# Altium PCB DClassAmp.PcbDoc (part 3 of 3)
Units mm, origin at the board's own origin, x right, y up, seen from the top; angles counter-clockwise.
Board outline 100 x 100 mm, 4 copper layers (Top Layer, Layer 1, Layer 2, Bottom Layer), stack 1.57 mm thick; 192 components, 70 nets, 450 pads, 316 vias.
Unrouted connection lines stored in the file: 103.
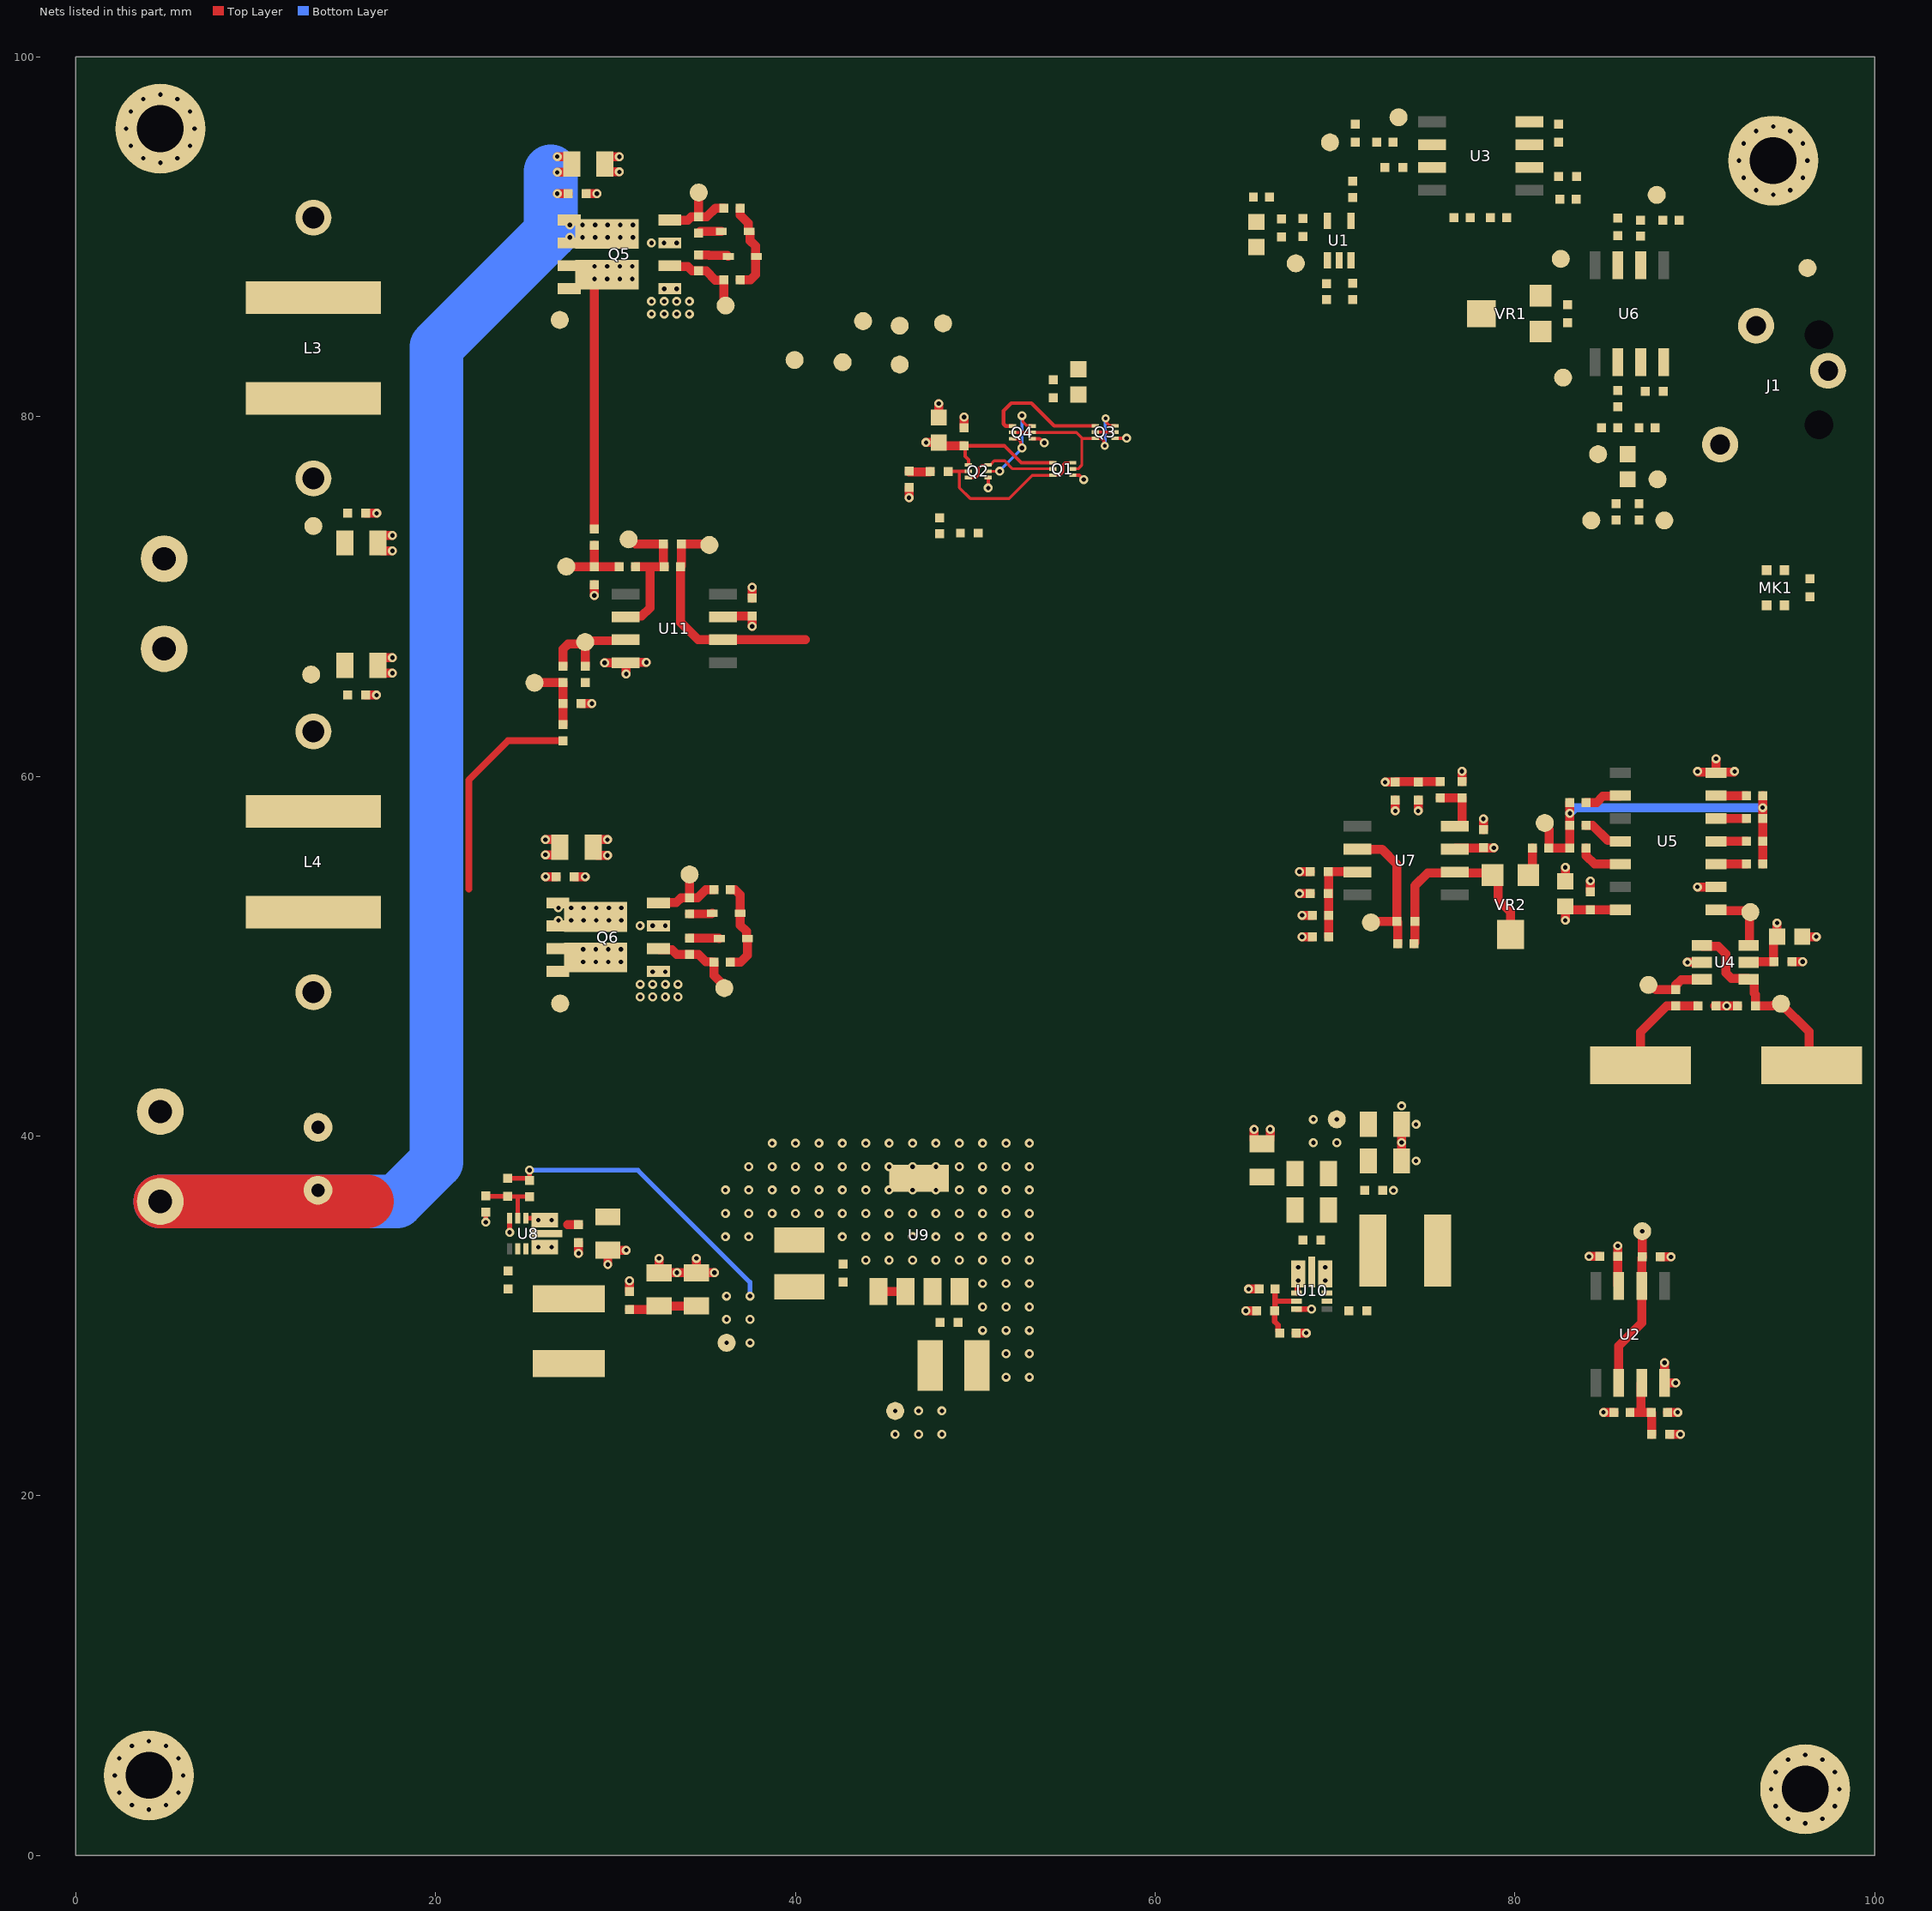
[diagram p4: the nets of this part, all layers, seen from the top]

## Part data (continued)
R34 R35 R36 R37 R39 R40 R41 R42: library part "RES 10R0 1% 63mW 0402", "Res Thick Film 0402 10 Ohm 1% 0.063W(1/16W) ±100ppm/C Pad SMD T/R", Case Code (Imperial)=0402, Case Code (Metric)=1005, Manufacturer=Samsung, Manufacturer Part Number=RC1005F100CS, Max Operating Temperature=155°C, Max Power Dissipation=63mW, Min Operating Temperature=-55°C, Package Quantity=1, Resistance=10R, Resistor Type="Thick Film", Supplier Part Number 1=1276-3428-1-ND, Temperature Coefficient=100ppm/°C, Tolerance=1%, Voltage Rating (DC)=50V, Case/Package=0402, Category="Chip SMD Resistors", ComponentLink1Description=http://components.arrow.com/part/dataview/51848233S9968285N4139?src-supplier=Arrow+Electronics, ComponentLink1URL=http://components.arrow.com/part/dataview/51848233S9968285N4139?src-supplier=Arrow+Electronics, ComponentLink2Description=http://components.arrow.com/part/dataview/0323_06900041?src-supplier=Arrow+Europe, ComponentLink2URL=http://components.arrow.com/part/dataview/0323_06900041?src-supplier=Arrow+Europe, ComponentLink3Description=http://www.samsungsem.com/servlet/FileDownload?type=spec&file=RC1005F9090CS.pdf&src-supplier=Avnet, ComponentLink3URL=http://www.samsungsem.com/servlet/FileDownload?type=spec&file=RC1005F9090CS.pdf&src-supplier=Avnet, ComponentLink4Description=http://www.samsungsem.com/kr/support/product-search/chip-resistor/RC1005F100CS.jsp?src-supplier=Digi-Key, ComponentLink4URL=http://www.samsungsem.com/kr/support/product-search/chip-resistor/RC1005F100CS.jsp?src-supplier=Digi-Key, Construction=Rectangular, Contact Plating=Tin, Depth=0.5mm, Features="Moisture Resistant", Height=0.016inch, Lead Free="Lead Free", Length=0.039inch, Military Standard=Not, Number of Terminations=2, Packaging="Tape and Reel", Pricing 1="1=0.10000, 10=0.01800, 100=0.00720, 1000=0.00323, 2500=0.00281, 5000=0.00232 (USD)", Radiation Hardening=No, RoHS=Yes, RoHS Compliant=Yes, Series=RC, Stock 1=7440, Supplier 1=Digi-Key, Width=0.02inch
TP1 TP2 TP3 TP4 TP5 TP6 TP7 TP8 TP9 TP10 TP11 TP12 TP13 TP14 TP15 TP16 TP17 TP18 TP19 TP20 TP21 TP22 TP23 TP24 TP25 TP26 TP27 TP28 TP29 TP30 TP31 TP32 TP33 TP34 TP35 TP36 TP37 TP38 TP39: library part "TP 1mm", "SMT testpoint"
U1: library part "IC COMP 2.5ns RRIO TLV3601DCKR", "2.5-ns high-speed rail-to-rail comparator with push-pull outputs 5-SC70 -40 to 125", Manufacturer="Texas Instruments", Supplier Part Number 1=296-TLV3601DCKRCT-ND, Manufacturer Part Number=TLV3601DCKR, Pricing 1="1=3.37000, 10=3.02700, 25=2.86200, 100=2.48040, 250=2.35320, 500=2.11152, 1000=2.10000 (USD)", RoHS=No, Stock 1=1261, Supplier 1=Digi-Key
U2 U3 U6 U7 U11: library part "IC OPAMP 10MHz 36V RRO TLV172IDR", "1-Channel, 10-MHz, 36V, high slew-rate, low-noise, RRO, op amp for cost-sensitive systems 8-SOIC -40 to 125", Case/Package=SOIC, Input Bias Current=10pA, Input Offset Voltage (Vos)=500uV, Manufacturer="Texas Instruments", Max Operating Temperature=125°C, Min Operating Temperature=-40°C, Operating Supply Current=1.6mA, Output Current per Channel=75mA, Supplier Part Number 1=296-47279-1-ND, Category="Amplifiers - Op Amps, Buffer, Instrumentation", ComponentLink1Description=http://www.ti.com/lit/ds/symlink/tlv172.pdf?src-supplier=Digi-Key, ComponentLink1URL=http://www.ti.com/lit/ds/symlink/tlv172.pdf?src-supplier=Digi-Key, Gain Bandwidth Product=10MHz, Manufacturer Part Number=TLV172IDR, Mount="Surface Mount", Number of Channels=1, Number of Circuits=1, Number of Pins=8, Packaging="Cut Tape", Pricing 1="1=1.23000, 10=1.09800, 25=1.04160, 100=0.85570, 250=0.79992, 500=0.70692, 1000=0.61425 (USD)", RoHS=Yes, RoHS Compliant=Yes, Slew Rate=10V/µs, Stock 1=2921, Supplier 1=Digi-Key
U4: library part "IC LOGIC INVERTER 2x 50mA", "Buffer 2-CH Non-Inverting Push-Pull CMOS 6-Pin SOT-23 T/R", Case/Package=SOT-23, High Level Output Current=-32mA, Low Level Output Current=32mA, Manufacturer="Texas Instruments", Manufacturer Part Number=SN74LVC2G34DBVR, Max Operating Temperature=125°C, Max Supply Voltage=5.5V, Min Operating Temperature=-40°C, Min Supply Voltage=1.65V, Nominal Supply Current=250mA, Package Quantity=3000, Quiescent Current=10uA, Category="Buffers, Drivers and Transceivers", ComponentLink1Description=https://datasheet.ciiva.com/27051/1046431-27051311.pdf?src-supplier=Jameco, ComponentLink1URL=https://datasheet.ciiva.com/27051/1046431-27051311.pdf?src-supplier=Jameco, ComponentLink2Description=https://datasheet.ciiva.com/7744/1771621-7744033.pdf?src-supplier=Element14, ComponentLink2URL=https://datasheet.ciiva.com/7744/1771621-7744033.pdf?src-supplier=Element14, ComponentLink3Description=https://datasheet.ciiva.com/15094/getdatasheetpartid-133639-15094759.pdf?src-supplier=Verical, ComponentLink3URL=https://datasheet.ciiva.com/15094/getdatasheetpartid-133639-15094759.pdf?src-supplier=Verical, ComponentLink4Description=https://datasheet.ciiva.com/14301/sn74lvc2g34-14301216.pdf?src-supplier=Avnet, ComponentLink4URL=https://datasheet.ciiva.com/14301/sn74lvc2g34-14301216.pdf?src-supplier=Avnet, ComponentLink5Description=https://datasheet.ciiva.com/46439/1785989-46439658.pdf?src-supplier=Element14, ComponentLink5URL=https://datasheet.ciiva.com/46439/1785989-46439658.pdf?src-supplier=Element14, ComponentLink6Description=https://datasheet.ciiva.com/1834/sn74lvc2g34-1834122.pdf?src-supplier=Digi-Key, ComponentLink6URL=https://datasheet.ciiva.com/1834/sn74lvc2g34-1834122.pdf?src-supplier=Digi-Key, ComponentLink7Description=https://datasheet.ciiva.com/1834/sn74lvc2g34-1834121.pdf?src-supplier=Digi-Key, ComponentLink7URL=https://datasheet.ciiva.com/1834/sn74lvc2g34-1834121.pdf?src-supplier=Digi-Key, ComponentLink8Description=https://datasheet.ciiva.com/1834/sn74lvc2g34-1834123.pdf?src-supplier=Digi-Key, ComponentLink8URL=https://datasheet.ciiva.com/1834/sn74lvc2g34-1834123.pdf?src-supplier=Digi-Key, ComponentLink9Description=https://datasheet.ciiva.com/14301/sn74lvc2g34-14301215.pdf?src-supplier=Avnet, ComponentLink9URL=https://datasheet.ciiva.com/14301/sn74lvc2g34-14301215.pdf?src-supplier=Avnet, ComponentLink10Description=https://datasheet.ciiva.com/16532/sn74lvc2g34-16532026.pdf?src-supplier=Avnet+Asia, ComponentLink10URL=https://datasheet.ciiva.com/16532/sn74lvc2g34-16532026.pdf?src-supplier=Avnet+Asia, ComponentLink11Description=https://datasheet.ciiva.com/48703/001074027-da-01-en-ic-buffer-d-sn74lvc2g34dbvr-sot-23-6-tid-48703269.pdf?src-supplier=Conrad, ComponentLink11URL=https://datasheet.ciiva.com/48703/001074027-da-01-en-ic-buffer-d-sn74lvc2g34dbvr-sot-23-6-tid-48703269.pdf?src-supplier=Conrad, Contact Plating=Tin,Matte, Height=1.15mm, Lead Free="Lead Free", Length=2.9mm, Logic Function=Buffer,Inverting, Max Output Current=32mA, Mount="Surface Mount", Number of Bits=2, Number of Bits per Element=1, Number of Channels=2, Number of Circuits=2, Number of Elements=2, Number of Gates=2, Number of Input Lines=2, Number of Inputs=2, Number of Output Lines=2, Number of Outputs=2, Number of Pins=6, Output Current=32mA, Packaging="Tape and Reel", Polarity=Non-Inverting, Pricing 1="3000=0.09770 (USD)", Propagation Delay=3.2ns, Radiation Hardening=No, REACH SVHC="No SVHC", RoHS=Yes, RoHS Compliant=Yes, Schmitt Trigger Input=No, Stock 1=261, Supplier 1="Arrow Electronics", Supplier Part Number 1=SN74LVC2G34DBVR, Termination=SMD/SMT, Turn-On Delay Time=8.6ns, Width=1.6mm
U5: library part "IC LOGIC 7B COUNTER", "MC14024BDG 7-stage Binary Counter; Up Counter; 3 - 18 V; 14-Pin SOIC", Case/Package=SOIC, Frequency=12MHz, Manufacturer="ON Semiconductor", Manufacturer Part Number=MC14024BDG, Max Operating Temperature=125°C, Max Supply Voltage=18V, Min Operating Temperature=-55°C, Min Supply Voltage=3V, Package Quantity=55, Supplier Part Number 1=MC14024BDGOS-ND, Category=Counters, ComponentLink1Description=https://datasheet.ciiva.com/15093/getdatasheetpartid-147916-15093453.pdf?src-supplier=Verical, ComponentLink1URL=https://datasheet.ciiva.com/15093/getdatasheetpartid-147916-15093453.pdf?src-supplier=Verical, ComponentLink2Description=https://datasheet.ciiva.com/1506/1691447-1506837.pdf?src-supplier=Element14, ComponentLink2URL=https://datasheet.ciiva.com/1506/1691447-1506837.pdf?src-supplier=Element14, ComponentLink3Description=https://datasheet.ciiva.com/1622/76285-1622497.pdf?src-supplier=Newark, ComponentLink3URL=https://datasheet.ciiva.com/1622/76285-1622497.pdf?src-supplier=Newark, ComponentLink4Description=https://datasheet.ciiva.com/16977/0900766b805fa2a2-16977232.pdf?src-supplier=Allied+Electronics, ComponentLink4URL=https://datasheet.ciiva.com/16977/0900766b805fa2a2-16977232.pdf?src-supplier=Allied+Electronics, ComponentLink5Description=https://datasheet.ciiva.com/8252/mc14024b-d-8252619.pdf?src-supplier=Avnet, ComponentLink5URL=https://datasheet.ciiva.com/8252/mc14024b-d-8252619.pdf?src-supplier=Avnet, ComponentLink6Description=https://datasheet.ciiva.com/16392/mc14024b-d-16392830.pdf?src-supplier=Future+Electronics, ComponentLink6URL=https://datasheet.ciiva.com/16392/mc14024b-d-16392830.pdf?src-supplier=Future+Electronics, ComponentLink7Description=https://datasheet.ciiva.com/26221/mc14024b-d-26221639.pdf?src-supplier=Avnet+Europe, ComponentLink7URL=https://datasheet.ciiva.com/26221/mc14024b-d-26221639.pdf?src-supplier=Avnet+Europe, Direction=Up,Unidirectional, Halogen Free="Halogen Free", Height=1.5mm, Lead Free="Lead Free", Length=8.75mm, Logic Function=Counter, Mount="Surface Mount", Number of Bits=7, Number of Bits per Element=7, Number of Circuits=1, Number of Elements=1, Number of Functions=1, Number of Input Lines=1, Number of Output Lines=7, Number of Pins=14, Output Characteristics=DIFFERENTIAL, Packaging=Rail/Tube, Pricing 1="1=0.63000, 10=0.55600, 25=0.52240, 100=0.42640, 250=0.39608, 500=0.33708, 1000=0.27825 (USD)", Propagation Delay=2000ns, Radiation Hardening=No, REACH SVHC="No SVHC", Reset=Asynchronous, RoHS=Yes, RoHS Compliant=Yes, Series=4000B, Stock 1=1443, Supplier 1=Digi-Key, Supply Voltage-Nom=18V, Technology=CMOS, Turn-On Delay Time=2000ns, Width=4mm
U8 U10: library part "IC REG BUCK 32V 3.5A AP63357DV-7", "AP63357 Series 32 V 3.5 A 450 kHz Synchronous Buck Converter - DFN3020-13", Manufacturer=Diodes, Supplier Part Number 1=31-AP63357DV-7CT-ND, Category="Voltage Regulators - Switching", Manufacturer Part Number=AP63357DV-7, Pricing 1="1=0.98000, 10=0.88000, 25=0.83560, 100=0.68630, 250=0.64152, 500=0.56694, 1000=0.44758 (USD)", RoHS=Yes, Stock 1=1191, Supplier 1=Digi-Key
U9: library part "IC LDO 3.3V 1.5A SOT-223 LP3962EMP-3.3/NOPB", "1.5-A, high-accuracy, low-dropout voltage regulator with enable 5-SOT-223 -40 to 125", Case/Package=SOT-223, Current Rating=1.5A, Dropout Voltage=380mV, Manufacturer="TI National Semiconductor", Manufacturer Part Number=LP3962EMP-3.3/NOPB, Max Input Voltage=7V, Max Operating Temperature=125°C, Min Input Voltage=2.5V, Min Operating Temperature=-40°C, Output Voltage Accuracy=1.5%, Package Quantity=1000, Quiescent Current=4mA, Supplier Part Number 1=LP3962EMP-3.3/NOPBCT-ND, Accuracy=1.5%, Category="Voltage Regulators - Linear", ComponentLink1Description=https://datasheet.ciiva.com/6591/lp3962-6591525.pdf?src-supplier=Digi-Key, ComponentLink1URL=https://datasheet.ciiva.com/6591/lp3962-6591525.pdf?src-supplier=Digi-Key, ComponentLink2Description=https://datasheet.ciiva.com/6591/lp3962-6591526.pdf?src-supplier=Digi-Key, ComponentLink2URL=https://datasheet.ciiva.com/6591/lp3962-6591526.pdf?src-supplier=Digi-Key, ComponentLink3Description=https://datasheet.ciiva.com/6591/lp3962-6591527.pdf?src-supplier=Digi-Key, ComponentLink3URL=https://datasheet.ciiva.com/6591/lp3962-6591527.pdf?src-supplier=Digi-Key, ComponentLink4Description=https://datasheet.ciiva.com/14278/lp3962-14278919.pdf?src-supplier=Avnet, ComponentLink4URL=https://datasheet.ciiva.com/14278/lp3962-14278919.pdf?src-supplier=Avnet, Contact Plating=Tin, Lead Free="Lead Free", Max Output Current=1.5A, Max Output Voltage=3.3V, Max Supply Voltage=7V, Min Supply Voltage=2.5V, Mount="Surface Mount", Number of Outputs=1, Number of Pins=5, Output Current=1.5A, Output Type=Fixed, Output Voltage=3.3V, Packaging="Tape and Reel", Polarity=Positive, Pricing 1="1=3.18000, 10=2.85800, 25=2.70240, 100=2.34190, 250=2.22180, 500=1.99362 (USD)", Radiation Hardening=No, REACH SVHC="No SVHC", RoHS=Yes, RoHS Compliant=Yes, Stock 1=372, Supplier 1=Digi-Key, Termination=SMD/SMT
VR1 VR2: library part "RES POT 20k 1T 0.1W", "Res Trimmer 20K Ohm 25% 1/10W 1(Elec)/1(Mech)Turn (3 X 3.8mm) Foot Print SMD Embossed T/R", Manufacturer=Bourns, Manufacturer Part Number=TC33X-2-203E, Max Operating Temperature=100°C, Max Power Dissipation=100mW, Min Operating Temperature=-40°C, Package Quantity=2500, Resistance=20kR, Resistance Tolerance=25%, Resistor Type=Cermet, Supplier Part Number 1=TC33X-2-203ECT-ND, Temperature Coefficient=250ppm/°C, Category="Variable Resistors and Potentiometers", ComponentLink1Description=https://datasheet.ciiva.com/22671/1537288-22671216.pdf?src-supplier=Element14, ComponentLink1URL=https://datasheet.ciiva.com/22671/1537288-22671216.pdf?src-supplier=Element14, ComponentLink2Description=https://datasheet.ciiva.com/11833/0900766b802749b3-11833400.pdf?src-supplier=RSComponents, ComponentLink2URL=https://datasheet.ciiva.com/11833/0900766b802749b3-11833400.pdf?src-supplier=RSComponents, ComponentLink3Description=https://datasheet.ciiva.com/6227/tc33-6227117.pdf?src-supplier=Digi-Key, ComponentLink3URL=https://datasheet.ciiva.com/6227/tc33-6227117.pdf?src-supplier=Digi-Key, ComponentLink4Description=https://datasheet.ciiva.com/6227/tc33-6227118.pdf?src-supplier=Digi-Key, ComponentLink4URL=https://datasheet.ciiva.com/6227/tc33-6227118.pdf?src-supplier=Digi-Key, ComponentLink5Description=https://datasheet.ciiva.com/6227/tc33-6227119.pdf?src-supplier=Digi-Key, ComponentLink5URL=https://datasheet.ciiva.com/6227/tc33-6227119.pdf?src-supplier=Digi-Key, ComponentLink6Description=https://datasheet.ciiva.com/30078/tc33-30078556.pdf?src-supplier=Onlinecomponents.com, ComponentLink6URL=https://datasheet.ciiva.com/30078/tc33-30078556.pdf?src-supplier=Onlinecomponents.com, ComponentLink7Description=https://datasheet.ciiva.com/15156/getdatasheetpartid-128027-15156621.pdf?src-supplier=Verical, ComponentLink7URL=https://datasheet.ciiva.com/15156/getdatasheetpartid-128027-15156621.pdf?src-supplier=Verical, ComponentLink8Description=https://datasheet.ciiva.com/7953/1818686-7953350.pdf?src-supplier=Element14, ComponentLink8URL=https://datasheet.ciiva.com/7953/1818686-7953350.pdf?src-supplier=Element14, ComponentLink9Description=https://datasheet.ciiva.com/22718/1520225-22718588.pdf?src-supplier=Element14, ComponentLink9URL=https://datasheet.ciiva.com/22718/1520225-22718588.pdf?src-supplier=Element14, Depth=3.8mm, Height=0.047inch, Length=3mm, Military Standard=Not, Mount="Surface Mount", Number of Turns=1, Packaging="Tape and Reel", Power Rating=100mW, Pricing 1="1=0.26000, 10=0.25200, 25=0.22760, 50=0.21700, 100=0.21000, 250=0.19600, 500=0.17850, 1000=0.16100 (USD)", Radiation Hardening=No, REACH SVHC="No SVHC", RoHS=Yes, RoHS Compliant=Yes, Series=TC33, Stock 1=95244, Supplier 1=Digi-Key, Termination="Foot Print", Tolerance=25%, Width=0.118inch
X1: library part "XTAL 4.000MHz 18pF HC-49", "Crystal 4MHz ±30ppm (Tol) ±50ppm (Stability) 18pF FUND 180Ohm 2-Pin HC-49/US SMD T/R", Case/Package=SMD/SMT, ESR (Equivalent Series Resistance)=180R, Frequency=4MHz, Frequency Stability=50ppm, Frequency Tolerance=30ppm, Load Capacitance=18pF, Manufacturer=Abracon, Manufacturer Part Number=ABLS-4.000MHZ-B4-T, Max Operating Temperature=70°C, Min Operating Temperature=-20°C, Operating Frequency="4 MHz", Package Quantity=1000, Supplier Part Number 1=535-10202-1-ND, Category=Crystals, ComponentLink1Description=https://datasheet.ciiva.com/15116/getdatasheetpartid-723826-15116860.pdf?src-supplier=Verical, ComponentLink1URL=https://datasheet.ciiva.com/15116/getdatasheetpartid-723826-15116860.pdf?src-supplier=Verical, ComponentLink2Description=https://datasheet.ciiva.com/860/abls-860304.pdf?src-supplier=Digi-Key, ComponentLink2URL=https://datasheet.ciiva.com/860/abls-860304.pdf?src-supplier=Digi-Key, ComponentLink3Description=https://datasheet.ciiva.com/860/abls-860305.pdf?src-supplier=Digi-Key, ComponentLink3URL=https://datasheet.ciiva.com/860/abls-860305.pdf?src-supplier=Digi-Key, ComponentLink4Description=https://datasheet.ciiva.com/860/abls-860306.pdf?src-supplier=Digi-Key, ComponentLink4URL=https://datasheet.ciiva.com/860/abls-860306.pdf?src-supplier=Digi-Key, ComponentLink5Description=https://datasheet.ciiva.com/3175/abls-3175417.pdf?src-supplier=Avnet, ComponentLink5URL=https://datasheet.ciiva.com/3175/abls-3175417.pdf?src-supplier=Avnet, Depth=4.7mm, Height=0.165inch, Lead Free="Lead Free", Length=11.4mm, Mount="Surface Mount", Packaging="Tape and Reel", Pricing 1="1=0.32000, 10=0.26400, 50=0.23760, 100=0.21120, 500=0.20064 (USD)", Radiation Hardening=No, REACH SVHC=Yes, RoHS=Yes, Series=ABLS, Series Resistance=180R, Stock 1=302, Supplier 1=Digi-Key, Termination=SMD/SMT, Tolerance=30ppm, Width=0.185inch

## Via types
v1: diameter 0.5, hole 0.25, Top Layer to Bottom Layer, tented both sides, 314 vias
v2: diameter 0.46, hole 0.2, Top Layer to Bottom Layer, tented both sides, 2 vias

## Nets (pads, with @x,y where several pads share a name; then routed paths per layer and width w, separated by ;. In a path a pad name is that pad's centre, name@x,y a point inside that pad or via, vN(x,y) a via of type N, cw(c..) or ccw(c..) an arc to the next point about the centre after c; other vN are vias at no path point)
4V0: C16.2 C17.2 C20.2 C21.2 C36.1 C38.2 C39.1 C40.2 C41.2 C42.1 L1.2 R13.2 R30.2 TP12.1 U4.5 U5.14 U9.1 U9.2 | length 30.9
  Top Layer w0.254: C38.2@24,37.648 25.1,37.648 R30.2@25.225,37.524 v1(25.225,38.099)
  Top Layer w0.5: C39.1@30.775,30.35 32.225,30.35 C41.2@32.425,30.55 C40.2@34.5,30.55 ; U9.1@44.625,31.344 U9.2@46.125,31.344 ; v1(68.175,52.275) R13.2@68.75,52.275 ; v1(82.804,51.992) C17.2@82.804,52.767 82.985,52.586 C21.2@84.201,52.586 85.851,52.586 U5.14@85.859,52.578 ; U4.5@92.994,49.657 93.025,49.688 C20.2@94.394,49.688 ; C20.2@94.369,49.784 94.369,51 C16.2@94.55,51.181 ; C16.2@94.575,51.085 v1(94.575,51.848)
  Bottom Layer w0.254: v1(25.225,38.099) 31.251,38.099 37.475,31.875 v1(37.475,31.1)
  other v1: 36.175,28.5 37.475,28.5 36.175,29.8 37.475,29.8 36.175,31.1
-4V0: C29.2 C30.1 C45.1 C46.1 C47.2 C50.2 C51.1 C52.1 R18.1 R33.1 TP15.1 U10.4 U10.8 | length 4.5
  Top Layer w0.3: U10.4@67.857,30.371 v1(68.696,30.371)
  Top Layer w0.5: R33.1@67.825,29.05 v1(68.4,29.05) ; v1(72.786,59.676) C29.2@73.355,59.676 73.38,59.701 R18.1@75.841,59.701
  other v1: 69.457,31.962 69.457,32.702 68.8,39.625 70.1,39.625 68.8,40.925 70.1,40.925
AUDIO_FB: C66.1 R10.2 R49.2 TP39.1 U11.6 | length 13.3
  Top Layer w0.5: TP39.1@35.219,72.864 35.159,72.924 C66.1@33.668,72.924 33.668,71.704 R49.2@33.618,71.654 33.618,68.565 34.593,67.59 U11.6@35.97,67.59 40.56,67.59
AUDIO_IN: C6.2 R5.2 R16.2 TP3.1
AUDIO_JACK: J1.2 R16.1 TP11.1
AUDIO_NORM: C26.1 R7.2 TP7.1 U6.6 VR1.2 VR1.3
COMP+: R1.1 U1.3
COMP-: R3.1 U1.4
COMP_OUT: R2.2 TP1.1 U1.1
GA: C57.1 D1.1 D2.2 R34.2 R37.2 R38.1 TP27.1 | length 5
  Top Layer w0.5: R37.2@36.925,87.6 37.494,87.6 37.787,87.893 37.787,88.856 D2.2@37.837,88.906 37.787,88.956 37.787,89.487 37.487,89.787 D1.1@37.487,90.253 ; R34.2@36.925,91.6 36.925,91.211 37.387,90.749 37.387,90.353 D1.1@37.437,90.303
GATE+: C57.2 Q1.5 Q2.3 Q2.6 TP17.1 | length 5.5
  Top Layer w0.16: Q2.6@49.623,76.612 50.034,76.612 50.173,76.751 50.173,77.111 50.354,77.292 50.703,77.292 Q2.3@50.723,77.312 50.823,77.312 51.057,77.546 51.636,77.546 52.082,77.1 54.311,77.1 Q1.5@54.322,77.089
GATE-: C62.2 Q1.3 Q1.6 Q2.5 TP18.1 | length 9.6
  Top Layer w0.16: 49.123,76.962 49.123,76.052 49.725,75.45 51.875,75.45 53.164,76.739 Q1.6@54.322,76.739 54.342,76.759 54.716,76.759 54.872,76.915 54.872,77.306 55.005,77.439 Q1.3@55.422,77.439
  Top Layer w0.2: C62.2@48.5,76.962 49.123,76.962 Q2.5@49.623,76.962
GB: C62.1 D3.1 D4.2 R39.2 R42.2 R43.1 TP32.1 | length 6.4
  Top Layer w0.5: R42.2@36.375,49.675 36.95,49.675 37.333,50.058 D4.2@37.333,50.984 ; R39.2@36.375,53.7 36.641,53.7 36.933,53.407 D3.1@36.933,52.381 36.933,51.726 37.283,51.376 D4.2@37.283,51.034 ; R43.1@46.316,76.925 47.475,76.925 C62.1@47.5,76.95
GHA: Q5.4 R34.1 R35.1 TP25.1 | length 4.6
  Top Layer w0.5: Q5.4@33.021,90.932 33.025,90.928 34.025,90.928 34.206,91.109 R35.1@34.625,91.109 ; TP25.1@34.625,92.462 R35.1@34.625,91.109 ; R34.1@36.025,91.6 35.565,91.6 35.074,91.109 R35.1@34.625,91.109
GHB: Q6.4 R39.1 R40.1 TP30.1 | length 4.7
  Top Layer w0.5: Q6.4@32.386,52.959 32.399,52.972 33.374,52.972 33.652,53.25 R40.1@34.125,53.25 ; TP30.1@34.121,54.54 34.125,54.537 R40.1@34.125,53.25 ; R39.1@35.475,53.7 35.028,53.7 34.578,53.25 R40.1@34.125,53.25
GLA: Q5.2 R36.1 R37.1 TP29.1 | length 4.6
  Top Layer w0.5: Q5.2@33.021,88.392 33.076,88.337 34.025,88.337 34.262,88.1 35.039,88.1 35.551,87.588 R37.1@35.801,87.588 ; R37.1@36.025,87.6 36.025,87.41 36.029,87.406 36.029,86.271 TP29.1@36.125,86.175
GLB: Q6.2 R41.1 R42.1 TP34.1 | length 4.9
  Top Layer w0.5: Q6.2@32.386,50.419 32.441,50.364 33.138,50.364 33.402,50.1 34.617,50.1 35.033,49.685 R42.1@35.32,49.685 ; R42.1@35.475,49.675 35.475,48.935 36.05,48.36 TP34.1@36.05,48.225
GND: C1.1 C2.1 C3.1 C4.1 C5.1 C7.2 C8.1 C9.2 C10.1 C11.1 C12.1 C13.1 C14.1 C15.1 C16.1 C17.1 C18.1 C19.1 C20.1 C21.1 C22.1 C23.1 C24.1 C25.1 C27.2 C28.1 C29.1 C30.2 C32.1 C33.1 C34.2 C36.2 C37.2 C39.2 C40.1 C41.1 C42.2 C43.2 C44.1 C49.2 C50.1 C51.2 C52.2 C53.1 C54.1 C55.1 C56.1 C58.1 C59.1 C60.1 C61.1 C63.1 C64.1 C65.1 J1.3 J3.1 L2.2 M1.1 M2.1 M3.1 M4.1 MK1.2 MK1.3 Q1.1 Q2.1 Q3.1 Q4.1 Q5.1 Q6.1 R6.1 R14.2 R19.1 R28.1 R31.1 R32.2 R38.2 R43.2 U1.2 U2.4 U3.4 U4.2 U5.2 U5.7 U6.4 U8.4 U8.8 U9.4 U9.5 U11.4 | length 51.5
  Top Layer w0.2: v1(50.723,76.034) Q2.1@50.723,76.612 ; Q4.1@53.175,78.775 53.579,78.775 53.813,78.541 v1(53.834,78.541) ; Q1.1@55.422,76.739 55.777,76.739 56.011,76.505 v1(56.028,76.505) v1@56.155,76.505 ; Q3.1@57.775,78.791 58.41,78.791 v1(58.415,78.796)
  Top Layer w0.254: v1(22.788,35.207) R31.1@22.788,35.775
  Top Layer w0.3: v1(24.119,34.644) U8.4@24.119,35.426
  Top Layer w0.5: C61.1@16.121,64.516 v1(16.721,64.516) ; C56.1@16.123,74.625 v1(16.723,74.625) ; v1(17.6,65.741) 17.025,65.741 16.8,65.966 C60.1@16.8,66.167 16.8,66.377 17.025,66.602 v1(17.6,66.602) ; v1(17.6,72.531) 17.025,72.531 16.823,72.733 16.823,73.197 17.025,73.398 v1(17.6,73.398) ; C58.1@27.713,54.421 v1(28.313,54.421) ; v1(27.95,33.476) C34.2@27.95,34.076 ; C64.1@28.087,64.049 v1(28.687,64.049) ; C53.1@28.425,92.4 v1(28.966,92.4) ; v1(28.825,70.054) C65.1@28.825,70.654 ; v1(29.401,66.317) 30.567,66.317 U11.4@30.57,66.32 ; v1(29.556,55.61) 28.981,55.61 28.756,55.835 C59.1@28.756,56.054 28.756,56.254 28.981,56.479 v1(29.556,56.479) ; v1(29.575,32.851) C33.1@29.575,33.651 v1(30.597,33.651) ; v1(30.216,93.606) 29.641,93.606 29.525,93.722 29.525,94.334 29.641,94.45 v1(30.216,94.45) ; v1(30.594,65.689) 30.594,66.296 U11.4@30.57,66.32 ; C39.2@30.775,31.35 v1(30.775,31.95) ; v1(31.719,66.339) 30.589,66.339 U11.4@30.57,66.32 ; v1(32.425,33.2) C41.1@32.425,32.4 v1(33.419,32.4) C40.1@34.5,32.4 ; v1(34.5,33.2) C40.1@34.5,32.4 ; v1(35.503,32.4) C40.1@34.5,32.4 ; C63.1@37.594,69.914 v1(37.594,70.514) ; v1(46.316,75.496) R43.2@46.316,76.071 ; C11.1@47.973,79.952 v1(47.973,80.727) ; C12.1@49.373,79.377 v1(49.373,79.977) ; v1(65.05,30.275) C49.2@65.65,30.275 ; v1(65.2,31.488) R32.2@65.775,31.488 ; v1(65.506,40.37) 65.506,39.795 65.731,39.57 C44.1@65.943,39.57 66.168,39.57 66.393,39.795 66.393,40.02 66.396,40.023 v1(66.396,40.37) ; v1(68.025,53.473) C27.2@68.625,53.473 ; v1(68.025,54.7) C18.1@68.625,54.7 ; v1(73.355,58.076) C29.1@73.355,58.676 ; C52.2@73.702,38.615 C51.2@73.702,40.647 ; v1(74.625,58.076) C30.2@74.625,58.676 ; R28.1@77.053,59.701 v1(77.053,60.276) ; C28.1@78.25,57.028 v1(78.25,57.628) ; C17.1@82.804,54.167 v1(82.804,54.942) ; v1(84.125,33.3) C5.1@84.725,33.3 ; C21.1@84.201,53.586 v1(84.201,54.186) ; C9.2@88.075,33.275 v1(88.675,33.275) ; v1(88.317,27.392) U2.4@88.317,26.27 v1(88.945,26.27) ; R6.1@88.475,24.638 v1(89.05,24.638) ; C7.2@88.6,23.413 v1(89.2,23.413) ; v1(89.594,49.657) U4.2@90.394,49.657 ; v1(90.148,53.848) U5.2@91.179,53.848 ; v1(90.152,60.271) 90.185,60.238 91.139,60.238 U5.7@91.179,60.198 ; C23.1@91.097,47.23 C24.1@92.383,47.23 ; v1(91.179,60.981) U5.7@91.179,60.198 ; v1(92.214,60.271) 92.181,60.238 91.219,60.238 U5.7@91.179,60.198 ; C20.1@95.394,49.688 v1(95.994,49.688) ; C16.1@95.975,51.085 v1(96.75,51.085)
  other v1: 96.139,1.783 95.189,2.038 97.089,2.038 4.064,2.545 94.494,2.733 97.784,2.733 3.114,2.8 5.014,2.8 2.419,3.495 5.709,3.495 94.239,3.683 98.039,3.683 2.164,4.445 5.964,4.445 94.494,4.633 97.784,4.633 95.189,5.328 97.089,5.328 2.419,5.395 5.709,5.395 96.139,5.583 3.114,6.09 5.014,6.09 4.064,6.345 51.713,26.595 53.013,26.595 51.713,27.895 53.013,27.895 50.413,29.195 51.713,29.195 53.013,29.195 50.413,30.495 51.713,30.495 53.013,30.495 50.413,31.795 51.713,31.795 53.013,31.795 43.913,33.095 45.213,33.095 46.513,33.095 47.813,33.095 49.113,33.095 50.413,33.095 51.713,33.095 53.013,33.095 25.71,33.826 26.45,33.826 36.113,34.395 37.413,34.395 42.613,34.395 43.913,34.395 45.213,34.395 46.513,34.395 47.813,34.395 49.113,34.395 50.413,34.395 51.713,34.395 53.013,34.395 36.113,35.695 37.413,35.695 38.713,35.695 40.013,35.695 41.313,35.695 42.613,35.695 43.913,35.695 45.213,35.695 46.513,35.695 47.813,35.695 49.113,35.695 50.413,35.695 51.713,35.695 53.013,35.695 36.113,36.995 37.413,36.995 38.713,36.995 40.013,36.995 41.313,36.995 42.613,36.995 43.913,36.995 45.213,36.995 46.513,36.995 47.813,36.995 49.113,36.995 50.413,36.995 51.713,36.995 53.013,36.995 73.252,36.975 37.413,38.295 38.713,38.295 40.013,38.295 41.313,38.295 42.613,38.295 43.913,38.295 45.213,38.295 46.513,38.295 47.813,38.295 49.113,38.295 50.413,38.295 51.713,38.295 53.013,38.295 74.502,38.615 38.713,39.595 40.013,39.595 41.313,39.595 42.613,39.595 43.913,39.595 45.213,39.595 46.513,39.595 47.813,39.595 49.113,39.595 50.413,39.595 51.713,39.595 53.013,39.595 73.702,39.64 74.502,40.647 73.702,41.672 91.773,47.23 31.371,47.734 32.071,47.734 32.771,47.734 33.471,47.734 31.371,48.434 32.071,48.434 32.771,48.434 33.471,48.434 32.071,49.134 32.771,49.134 32.006,85.707 32.706,85.707 33.406,85.707 34.106,85.707 32.006,86.407 32.706,86.407 33.406,86.407 34.106,86.407 32.706,87.107 33.406,87.107 94.361,92.334 93.411,92.589 95.311,92.589 92.716,93.284 96.006,93.284 4.699,94.112 92.461,94.234 96.261,94.234 3.749,94.367 5.649,94.367 3.054,95.062 6.344,95.062 92.716,95.184 96.006,95.184 93.411,95.879 95.311,95.879 2.799,96.012 6.599,96.012 94.361,96.134 3.054,96.962 6.344,96.962 3.749,97.657 5.649,97.657 4.699,97.912
INPUT_FILT_OUT: C8.2 FB1.2 R3.2 TP10.1
INPUT_OUT: FB1.1 R12.2 TP5.1 U3.6
LEVEL_SHIFT+: C6.1 R8.2 R9.2 R14.1 TP13.1
MK_OUT: MK1.4 R5.1 TP2.1
NetC2_2: C2.2 C3.2 C4.2 FB2.2 U1.5
NetC7_1: C7.1 R4.1 R6.2 U2.3 | length 4.1
  Top Layer w0.5: R4.1@86.4,24.638 87,24.638 ; U2.3@87.047,26.27 87,26.223 87,24.638 ; C7.1@87.6,23.413 87.604,23.417 87.604,24.609 R6.2@87.575,24.638 87,24.638
NetC15_2: C15.2 Q3.2 Q3.5 R2.1 R19.2 | length 1.1
  Top Layer w0.16: Q3.5@56.675,79.141 Q3.2@57.775,79.141
NetC18_2: C18.2 C27.1 R13.1 R15.1 U7.7 | length 5.3
  Top Layer w0.5: R15.1@69.65,51.075 R13.1@69.65,52.275 69.65,54.675 C18.2@69.625,54.7 71.23,54.7 U7.7@71.25,54.68
NetC23_2: C23.2 R25.2 X1.1 | length 5.6
  Top Layer w0.5: X1.1@86.99,43.928 86.99,45.789 88.431,47.23 R25.2@88.95,47.23 C23.2@90.097,47.23
NetC26_2: C26.2 R9.1 TP6.1 U6.2 VR1.1
NetC31_2: C31.2 R20.2 U7.2 VR2.2 VR2.3 | length 11.7
  Top Layer w0.5: R20.2@74.395,50.703 74.445,50.753 C31.2@74.445,51.936 74.445,53.923 75.152,54.63 76.6,54.63 U7.2@76.65,54.68 76.7,54.63 78.631,54.63 VR2.3@78.756,54.505 79.07,54.191 79.07,53.155 79.756,52.469 VR2.2@79.756,51.205
NetC35_1: C35.1 U8.6
NetC35_2: C35.2 L1.1 U8.7 U8.9
NetC38_1: C38.1 R30.1 R31.2 U8.3 | length 3.7
  Top Layer w0.254: R31.2@22.76,36.648 C38.1@24,36.648 24.012,36.636 24.6,36.636 ; U8.3@24.569,35.426 24.569,36.605 24.6,36.636 ; R30.1@25.225,36.624 25.213,36.636 24.6,36.636
NetC48_1: C48.1 U10.6
NetC48_2: C48.2 L2.1 U10.7 U10.9
NetC49_1: C49.1 R32.1 R33.2 U10.3 | length 3.8
  Top Layer w0.3: R32.1@66.675,31.488 66.663,31.475 66.663,30.875 ; R33.2@66.925,29.05 66.832,29.143 66.832,29.493 66.65,29.675 C49.1@66.65,30.275 66.663,30.288 66.663,30.875 ; U10.3@67.857,30.821 66.717,30.821 66.663,30.875
NetC55_2: C55.2 C56.2 J2.1 L3.2 TP26.1
NetC60_2: C60.2 C61.2 J2.2 L4.2 TP31.1
NetC64_2: C64.2 R45.2 R46.2 TP36.1 | length 3.9
  Top Layer w0.5: TP36.1@25.5,65.2 25.525,65.225 R46.2@27.087,65.225 ; R45.2@27.087,62.873 C64.2@27.087,64.049 R46.2@27.087,65.225
NetC65_2: C65.2 R47.2 R48.2 TP37.1 | length 4.1
  Top Layer w0.5: TP37.1@27.268,71.654 C65.2@28.825,71.654 ; R47.2@28.825,72.85 C65.2@28.825,71.654 ; R48.2@30.211,71.654 C65.2@28.825,71.654
NetC66_2: C66.2 R48.1 R49.1 TP38.1 U11.2 | length 8.8
  Top Layer w0.5: U11.2@30.57,68.86 30.62,68.91 31.451,68.91 31.915,69.373 31.915,71.654 ; TP38.1@30.73,73.178 30.866,73.178 31.12,72.924 C66.2@32.668,72.924 32.668,71.704 R49.1@32.718,71.654 ; R48.1@31.111,71.654 31.915,71.654 ; R49.1@32.718,71.654 31.915,71.654
NetD1_2: D1.2 R35.2 | length 1.3
  Top Layer w0.5: R35.2@34.625,90.209 34.719,90.303 D1.2@35.877,90.303
NetD2_1: D2.1 R36.2 | length 1.7
  Top Layer w0.5: R36.2@34.625,89 35.164,89 35.208,88.956 36.208,88.956 D2.1@36.258,88.906
NetD3_2: D3.2 R40.2 | length 1.3
  Top Layer w0.5: R40.2@34.125,52.35 35.342,52.35 D3.2@35.373,52.381
NetD4_1: D4.1 R41.2 | length 1.6
  Top Layer w0.5: R41.2@34.125,51 35.739,51 D4.1@35.754,50.984
NetJ1_1: J1.1 TP16.1
NetQ1_2: Q1.2 Q3.3 Q3.6 Q4.2 Q4.5 TP8.1 | length 10
  Top Layer w0.16: Q4.5@52.075,79.125 Q4.2@53.175,79.125 55.624,79.125 55.922,78.827 55.922,78.791 ; Q1.2@55.422,77.089 55.433,77.1 55.73,77.1 55.922,77.292 55.922,78.791 ; v2(57.202,78.382) 57.144,78.44 57.144,78.637 56.992,78.789 56.677,78.789 Q3.6@56.675,78.791 55.922,78.791 ; v2(57.247,79.901) 57.304,79.843 57.304,79.666 57.467,79.502 57.763,79.502 Q3.3@57.775,79.491
  Bottom Layer w0.16: v2(57.202,78.382) 57.224,78.405 57.224,79.879 v2(57.247,79.901)
NetQ2_2: Q2.2 Q4.3 Q4.6 TP9.1 | length 6.1
  Top Layer w0.16: Q2.2@50.723,76.962 v1(51.361,76.962) ; Q4.6@52.075,78.775 52.094,78.756 52.375,78.756 52.531,78.6 52.531,78.319 v1(52.596,78.254) ; v1(52.596,80.054) 52.638,80.012 52.638,79.724 52.871,79.49 53.16,79.49 Q4.3@53.175,79.475
  Bottom Layer w0.16: v1(51.361,76.962) 51.361,76.991 52.596,78.226 v1(52.596,78.254) v1(52.596,80.054)
NetR7_1: R7.1 R10.1 R11.1 TP4.1 U3.2
NetR11_2: R11.2 R12.1
NetR17_1: R17.1 VR2.1 | length 1.6
  Top Layer w0.5: VR2.1@80.756,54.505 80.982,54.731 R17.1@80.982,56.007
NetR18_2: R18.2 R28.2 U7.4 | length 3.2
  Top Layer w0.5: R18.2@75.841,58.801 R28.2@77.053,58.801 77.053,57.27 77.003,57.22 U7.4@76.65,57.22
NetR21_2: R21.2 U5.3 | length 1.7
  Top Layer w0.5: U5.3@91.179,55.118 R21.2@92.87,55.118
NetR22_2: R22.2 U5.4 | length 1.7
  Top Layer w0.5: U5.4@91.179,56.388 R22.2@92.87,56.388
NetR23_2: R23.2 U5.5 | length 1.7
  Top Layer w0.5: U5.5@91.179,57.658 R23.2@92.87,57.658
NetR24_2: R24.2 U5.6 | length 1.7
  Top Layer w0.5: U5.6@91.179,58.928 R24.2@92.87,58.928
NetR26_2: R26.2 U5.9 | length 2.1
  Top Layer w0.5: R26.2@83.958,58.547 84.553,58.547 84.894,58.888 85.819,58.888 U5.9@85.859,58.928
NetR27_2: R27.2 U5.11 | length 2.3
  Top Layer w0.5: R27.2@83.958,57.277 84.317,57.277 85.166,56.428 85.819,56.428 U5.11@85.859,56.388
NetR29_2: R29.2 U5.12 | length 2.5
  Top Layer w0.5: R29.2@83.958,56.007 83.958,55.588 84.428,55.118 U5.12@85.859,55.118
NetR44_2: R44.2 R46.1 TP35.1 U11.3 | length 6
  Top Layer w0.5: R46.1@27.087,66.125 27.087,67.074 27.38,67.367 28.222,67.367 TP35.1@28.317,67.463 ; R44.2@28.325,66.15 28.317,66.158 TP35.1@28.317,67.463 ; U11.3@30.57,67.59 30.52,67.54 28.394,67.54 TP35.1@28.317,67.463
SHA: L3.1 Q5.3 Q5.7 Q5.8 R47.1 TP28.1 | length 13.9
  Top Layer w0.5: R47.1@28.825,73.75 28.825,87.645 v1(28.837,87.657)
  other v1: 29.537,87.657 30.237,87.657 30.937,87.657 28.837,88.357 29.537,88.357 30.237,88.357 30.937,88.357 32.001,89.662 32.701,89.662 33.401,89.662
SHB: L4.1 Q6.3 Q6.7 Q6.8 R45.1 TP33.1 | length 12.2
  Top Layer w0.381: 21.85,53.725 21.85,59.8 24.023,61.973 R45.1@27.087,61.973
  other v1: 28.202,49.684 28.902,49.684 29.602,49.684 30.302,49.684 28.202,50.384 28.902,50.384 29.602,50.384 30.302,50.384 31.366,51.689 32.066,51.689 32.766,51.689
SQR_WAVE: R17.2 R21.1 R22.1 R23.1 R24.1 R26.1 R27.1 R29.1 TP22.1 | length 19.9
  Top Layer w0.5: TP22.1@81.661,57.404 81.661,57.269 81.899,57.031 81.899,56.024 R17.2@81.882,56.007 R29.1@83.058,56.007 R27.1@83.058,57.277 R26.1@83.058,58.547 ; R21.1@93.77,55.118 R22.1@93.77,56.388 R23.1@93.77,57.658 R24.1@93.77,58.928
  Bottom Layer w0.5: v1(83.058,57.947) 83.369,58.258 v1(93.77,58.258)
TRIANGLE_WAVE: C31.1 R1.2 R20.1 TP24.1 U7.6 | length 8.4
  Top Layer w0.5: U7.6@71.25,55.95 72.603,55.95 73.445,55.107 C31.1@73.445,51.936 ; TP24.1@72,51.878 72.058,51.936 C31.1@73.445,51.936 ; R20.1@73.495,50.703 73.495,51.886 C31.1@73.445,51.936
VBIAS: C9.1 C22.2 C25.2 C28.2 R44.1 TP23.1 U2.2 U2.6 U3.3 U6.3 U7.3 | length 11.2
  Top Layer w0.5: U7.3@76.65,55.95 76.7,56 78.175,56 78.203,56.028 C28.2@78.25,56.028 78.258,56.02 78.819,56.02 v1(78.827,56.028) ; U2.2@85.777,26.27 85.777,28.335 87.047,29.605 U2.6@87.047,31.67 87.047,33.222 C9.1@87.1,33.275 ; C9.1@87.075,33.275 87.075,33.451 87.078,33.454 87.078,34.589 TP23.1@87.174,34.685
  other v1: 87.08,34.708
VCCA: C1.2 C5.2 C10.2 C19.2 C37.1 C43.1 C63.2 FB2.1 MK1.1 R4.2 R8.1 R15.2 TP14.1 U2.7 U3.7 U6.7 U9.3 U11.7 | length 5.6
  Top Layer w0.5: U11.7@35.97,68.86 36.02,68.91 37.59,68.91 C63.2@37.594,68.914 v1(37.594,68.344) ; v1(68.175,51.075) R15.2@68.75,51.075 ; v1(84.925,24.638) R4.2@85.5,24.638 ; v1(85.725,33.893) 85.725,32.443 85.727,32.441 85.727,31.72 U2.7@85.777,31.67
  other v1: 45.55,23.414 46.85,23.414 48.15,23.414 45.55,24.714 46.85,24.714 48.15,24.714
VDD: C13.2 C14.2 Q3.4 Q4.4 | length 7.1
  Top Layer w0.2: Q4.4@52.075,79.475 51.692,79.475 51.575,79.592 51.575,80.325 52,80.75 53.125,80.75 54.384,79.491 Q3.4@56.675,79.491
VSYS: C11.2 C12.2 C32.2 C33.2 C34.1 C44.2 C45.2 C46.2 C47.1 C53.2 C54.2 C58.2 C59.2 J3.2 Q1.4 Q2.4 Q5.5 Q5.6 Q6.5 Q6.6 U8.1 U8.2 U10.1 U10.2 | length 102.2
  Top Layer w0.2: v1@47.217,78.558 v1(47.262,78.558) ; C11.2@47.967,78.558 C11.2@47.973,78.552 ; Q2.4@49.623,77.312 49.623,77.604 49.437,77.79 49.437,78.313 C12.2@49.373,78.377 51.623,78.377 51.623,78.372 52.557,77.439 Q1.4@54.322,77.439
  Top Layer w0.254: U8.2@25.019,35.426 25.61,35.426 v1(25.71,35.326)
  Top Layer w0.3: U10.2@67.857,31.271 67.907,31.271 67.907,32.271 U10.1@67.957,32.321
  Top Layer w0.5: v1(26.106,55.636) 26.681,55.636 26.906,55.861 C59.2@26.906,56.054 26.906,56.254 26.681,56.479 v1(26.106,56.479) ; v1(26.113,54.421) C58.2@26.713,54.421 ; v1(26.766,92.4) C53.2@27.366,92.4 ; v1(26.766,93.584) 26.769,93.587 27.341,93.587 27.566,93.812 C54.2@27.566,94.037 27.566,94.233 27.341,94.458 v1(26.766,94.458) ; 27.354,35.076 C34.1@27.95,35.076 ; v1(47.262,78.558) C11.2@47.967,78.558 ; C11.2@47.973,78.552 48.148,78.377 C12.2@49.373,78.377
  Top Layer w3: J3.2@4.695,36.362 16.175,36.362
  Bottom Layer w3: J3.2@4.695,36.362 17.837,36.362 20.05,38.575 20.05,83.881 26.4,90.231 26.4,93.625
  other v1: 67.957,31.962 67.957,32.702 26.45,35.326 26.831,51.989 27.531,51.989 28.231,51.989 28.931,51.989 29.631,51.989 30.331,51.989 26.831,52.689 27.531,52.689 28.231,52.689 28.931,52.689 29.631,52.689 30.331,52.689 27.466,89.962 28.166,89.962 28.866,89.962 29.566,89.962 30.266,89.962 30.966,89.962 27.466,90.662 28.166,90.662 28.866,90.662 29.566,90.662 30.266,90.662 30.966,90.662
XTAL+: C24.2 TP20.1 U4.1 U4.4 X1.2 | length 11.4
  Top Layer w0.5: U4.1@90.394,50.607 90.444,50.557 91.294,50.557 91.725,50.126 91.725,49.075 92.043,48.757 92.944,48.757 U4.4@92.994,48.707 93.244,48.707 93.294,48.657 93.294,47.946 93.383,47.857 C24.2@93.383,47.23 94.308,47.23 94.339,47.261 94.693,47.261 TP20.1@94.788,47.357 96.348,45.797 96.348,44.07 X1.2@96.49,43.928
XTAL-: R25.1 TP19.1 U4.3 | length 3.5
  Top Layer w0.5: TP19.1@87.425,48.4 87.56,48.4 87.831,48.13 R25.1@88.95,48.13 88.95,48.392 89.243,48.685 90.372,48.685 U4.3@90.394,48.707
XTAL_OUT: TP21.1 U4.6 U5.1 | length 3.8
  Top Layer w0.5: U5.1@91.179,52.578 91.219,52.538 93.004,52.538 TP21.1@93.091,52.451 93.042,52.402 93.042,50.655 U4.6@92.994,50.607
pads on no net: J1.4 J1.5 U2.1 U2.5 U2.8 U3.1 U3.5 U3.8 U5.8 U5.10 U5.13 U6.1 U6.5 U6.8 U7.1 U7.5 U7.8 U8.5 U10.5 U11.1 U11.5 U11.8

## Polygon pours and split planes (outlines as drawn)
SHA on Bottom Layer "SHA_L04_P003" (solid, pour order 3): 33.656,89.967 33.656,89.357 31.647,87.348 28.635,87.348 28.46,87.523 28.46,88.373 28.814,88.727 30.561,88.727 31.801,89.967
SHB on Bottom Layer "SHB_L04_P002" (solid, pour order 2): 33.021,51.994 33.021,51.384 31.012,49.375 28,49.375 27.825,49.55 27.825,50.4 28.179,50.754 29.926,50.754 31.166,51.994
GND on Top Layer "GND_L01_P018" (solid, pour order 18): 74.95,31.625 73.55,33.025 73.55,35.577 72.402,36.725 72.402,37.225 73.227,38.05 73.227,41.827 73.625,42.225 75.7,42.225 76.45,41.475 76.45,31.625
VSYS on Top Layer "VSYS_L01_P017" (solid, pour order 17): 65.243,38.195 66.885,38.195 67.307,38.617 68.257,38.617 68.257,35.185 68.457,34.985 68.457,33.975 68.357,33.875 68.357,31.571 67.379,31.571 65.243,33.707
-4V0 on Top Layer "-4V0_L01_P016" (solid, pour order 16): 68.35,41.775 67.75,41.175 67.75,40.1 69.157,38.693 69.157,34.675 68.957,34.475 68.957,33.975 69.057,33.875 69.057,31.571 69.857,31.571 70.7,32.414 70.7,35.523 71.902,36.725 71.902,37.49 72.327,37.915 72.327,41.347 71.899,41.775
NetC48_1 on Top Layer "NETC48_1_L01_P015" (solid, pour order 15): 69.257,30.971 70.579,30.971 71.025,30.525 71.025,30.025 70.503,30.025 69.857,30.671 69.257,30.671
NetC48_2 on Top Layer "NETC48_2_L01_P014" (solid, pour order 14): 68.907,31.571 68.907,33.301 68.507,33.301 68.507,31.324 68.71,31.121 70.429,31.121 71.525,30.025 72.025,30.025 72.85,30.85 72.85,35.625 71.35,35.625 70.7,34.975 70.7,32.179 69.942,31.421 69.057,31.421
NetC35_2 on Top Layer "NETC35_2_L01_P006" (solid, pour order 6): 27.049,34.376 25.319,34.376 25.169,34.226 25.169,33.426 26.595,32 29.1,32 29.31,31.79 29.4,31.7 29.4,30.2 24.825,30.2 23.775,31.25 23.775,31.75 24.869,32.844 24.869,34.644 25.001,34.776 27.049,34.776
NetC35_1 on Top Layer "NETC35_1_L01_P007" (solid, pour order 7): 24.275,32.25 23.775,32.25 23.775,32.782 24.419,33.426 24.419,34.026 24.719,34.026 24.719,32.694
GND on Top Layer "GND_L01_P008" (solid, pour order 8): 30.21,31.1 31.025,31.1 31.85,31.925 35.725,31.925 36.2,32.4 36.2,33.475 35.549,34.126 28.875,34.126 28.675,34.326 26.919,34.326 26.819,34.226 25.319,34.226 25.319,33.426 26.745,32 29.31,32
4V0 on Top Layer "4V0_L01_P009" (solid, pour order 9): 35.475,31.025 31.45,31.025 31.025,30.6 30.142,30.6 29.754,30.212 29.267,29.725 27.025,29.725 25.4,28.1 25.4,26.6 36.075,26.6 38.05,28.575 38.05,31.3 37.7,31.65 36.1,31.65
VSYS on Top Layer "VSYS_L01_P010" (solid, pour order 10): 25.319,34.926 25.319,35.726 27.118,37.525 30.625,37.525 31,37.15 31,35.462 30.564,35.026 28.875,35.026 28.675,34.826 27.7,34.826 27.6,34.926
GND on Top Layer "GND_L01_P011" (solid, pour order 11): 42.4,32.639 48.08,32.639 48.625,32.094 48.625,30.594 48.8,30.419 48.8,29.389 49.4,28.789 49.4,25.839 52.775,25.839 53.425,26.489 53.425,39.789 52.85,40.364 38.75,40.364 35.825,37.439 35.825,34.284 36.595,33.514 41.525,33.514
VCCA on Top Layer "VCCA_L01_P012" (solid, pour order 12): 44.725,23.539 45.3,22.964 48.125,22.964 48.55,23.389 48.55,25.689 48.3,25.939 48.3,31.919 48.125,32.094 47.125,32.094 47.125,30.539 44.725,28.139
4V0 on Top Layer "4V0_L01_P013" (solid, pour order 13): 39.325,28.389 37.586,28.389 35.788,30.188 35.788,31.337 36.764,32.314 42.225,32.314 42.4,32.139 42.9,32.139 46.625,32.094 46.625,30.214 44.8,28.389
SHB on Top Layer "SHB_L01_P000" (solid, pour order 0): 29.926,50.754 31.166,51.994 33.021,51.994 33.021,51.384 30.651,49.014 27.992,46.355 12.827,46.355 9.398,49.784 9.398,53.34 10.033,53.975 21.971,53.975 25.192,50.754
SHA on Top Layer "SHA_L01_P005" (solid, pour order 5): 29.11,84.811 24.389,84.811 23.485,85.714 9.458,85.714 9.458,89.883 12.75,93.175 20.925,93.175 25.373,88.727 30.561,88.727 31.286,89.452 31.801,89.967 33.656,89.967 33.656,89.357
NetC55_2 on Top Layer "NETC55_2_L01_P004" (solid, pour order 4): 9.458,81.914 9.458,77.492 7.18,75.214 3.846,75.214 2.65,74.018 2.65,70.784 3.971,69.463 12.696,69.463 15.425,72.192 15.425,78.581 16.958,80.114 16.958,81.914
NetC60_2 on Top Layer "NETC60_2_L01_P001" (solid, pour order 1): 9.458,57.145 9.458,61.567 7.18,63.845 3.846,63.845 2.65,65.041 2.65,68.275 3.971,69.596 12.696,69.596 15.425,66.867 15.425,60.478 16.958,58.945 16.958,57.145
VCCA on Layer 1 (split plane): 99.49,0.51 0.51,0.51 0.51,99.49 99.49,99.49
GND on Layer 2 (split plane): 99.49,0.51 0.51,0.51 0.51,99.49 99.49,99.49

## Silkscreen, mask and mechanical layers (free items; w line width, h text height)
Bottom 3D Body Top/3D Body Bot:
  the board outline again, w0.2